# Altium PCB PCB1.PcbDoc
Units mm, origin at the board's own origin, x right, y up, seen from the top; angles counter-clockwise.
Board outline 30.17 x 30.17 mm, 4 copper layers (Top Layer, Layer 1, Layer 2, Bottom Layer), stack 0.603 mm thick; 57 components, 53 nets, 226 pads, 94 vias.
Unrouted connection lines stored in the file: 5.
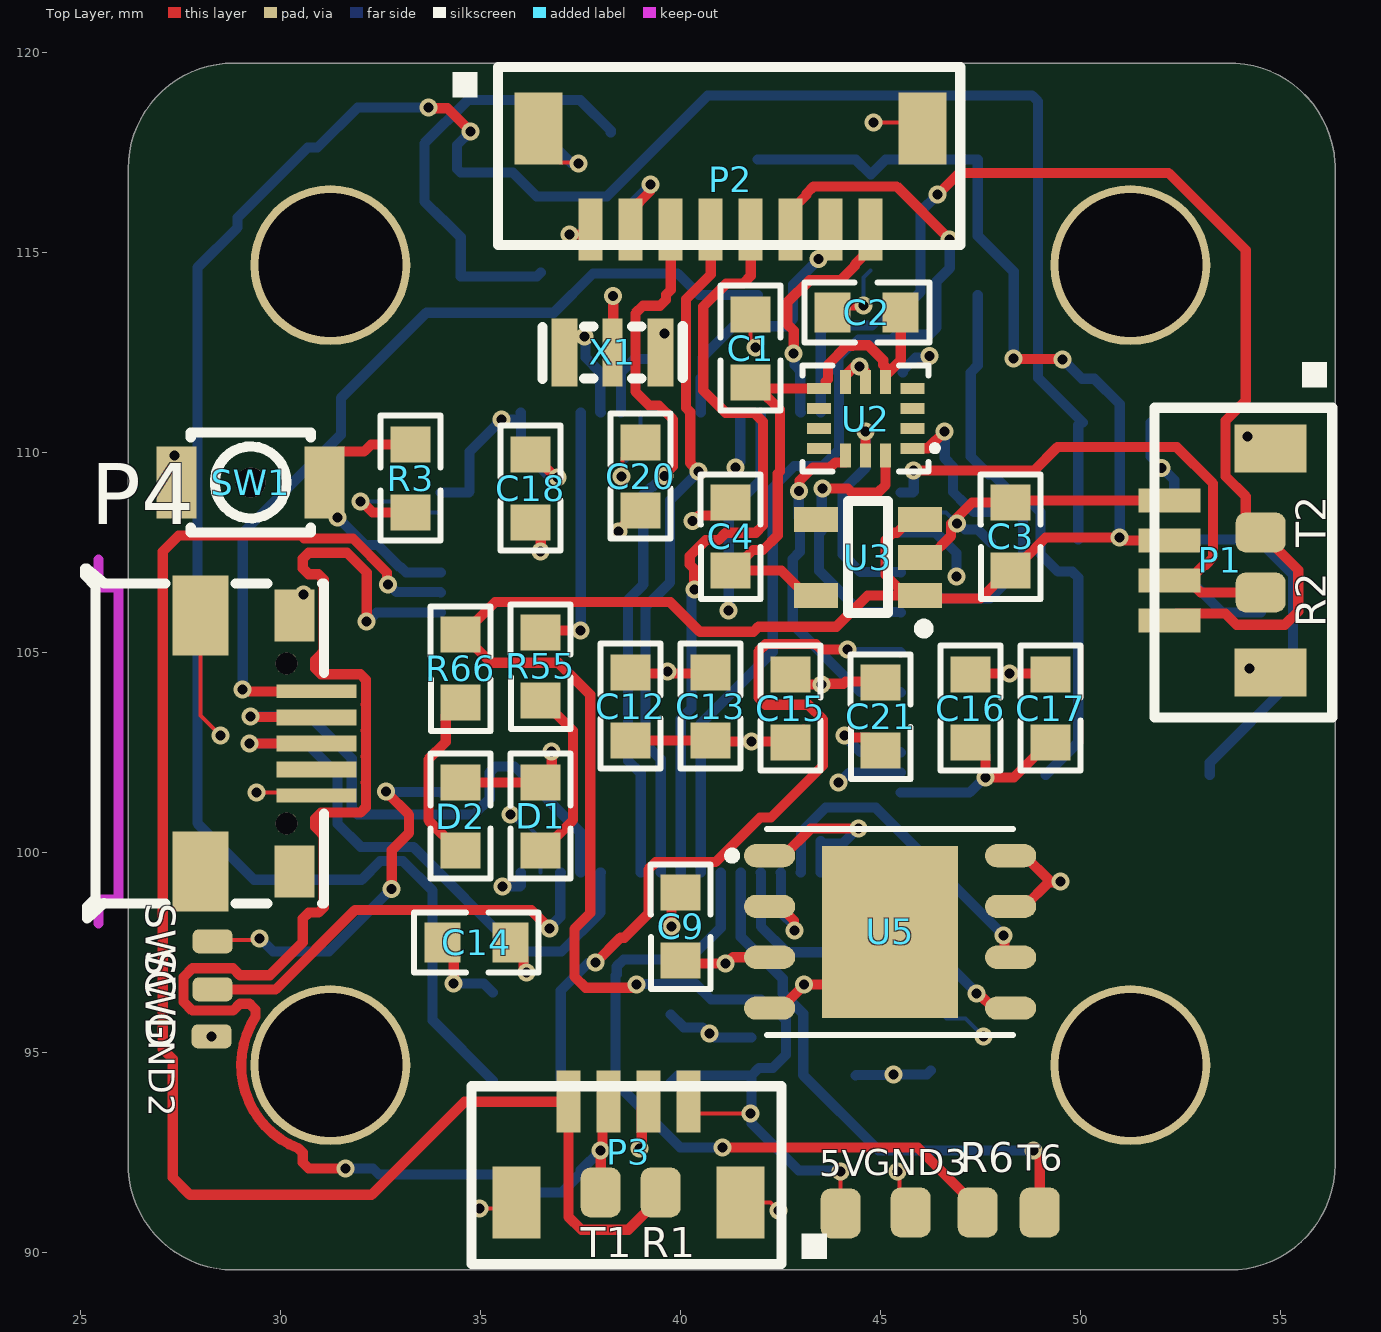
[diagram p0: Top Layer view]
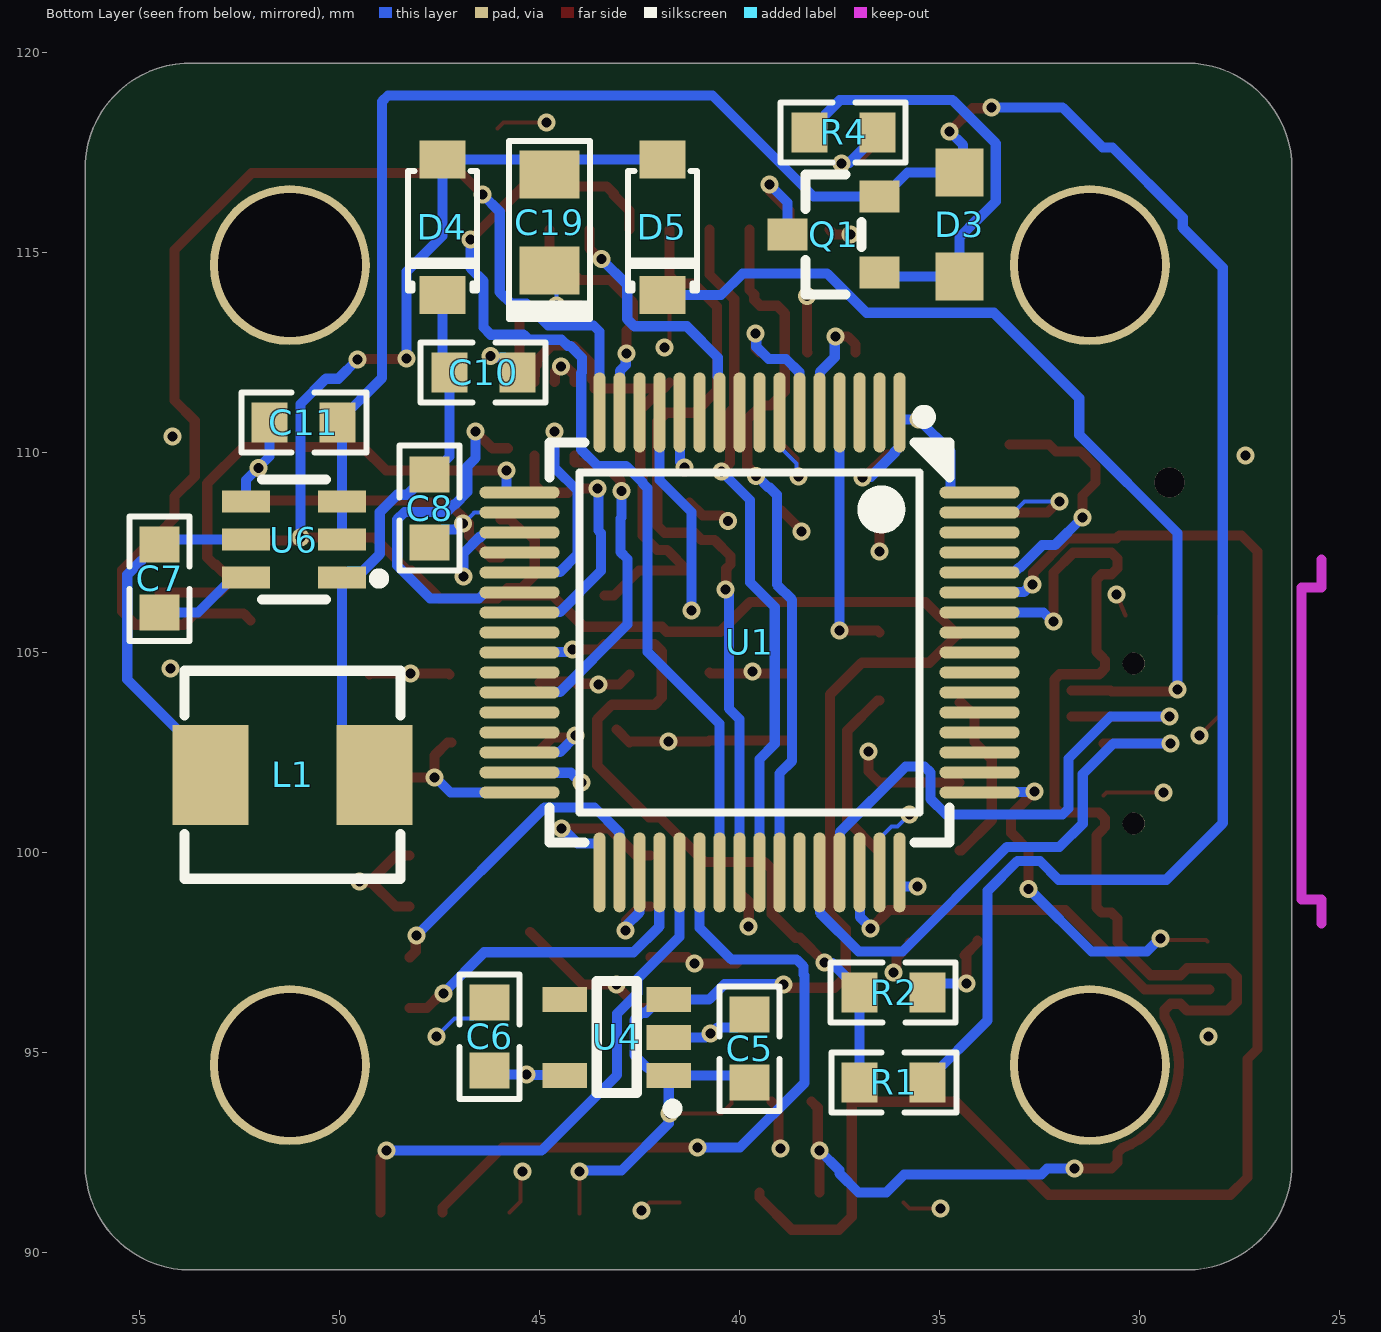
[diagram p1: Bottom Layer view, seen from below]
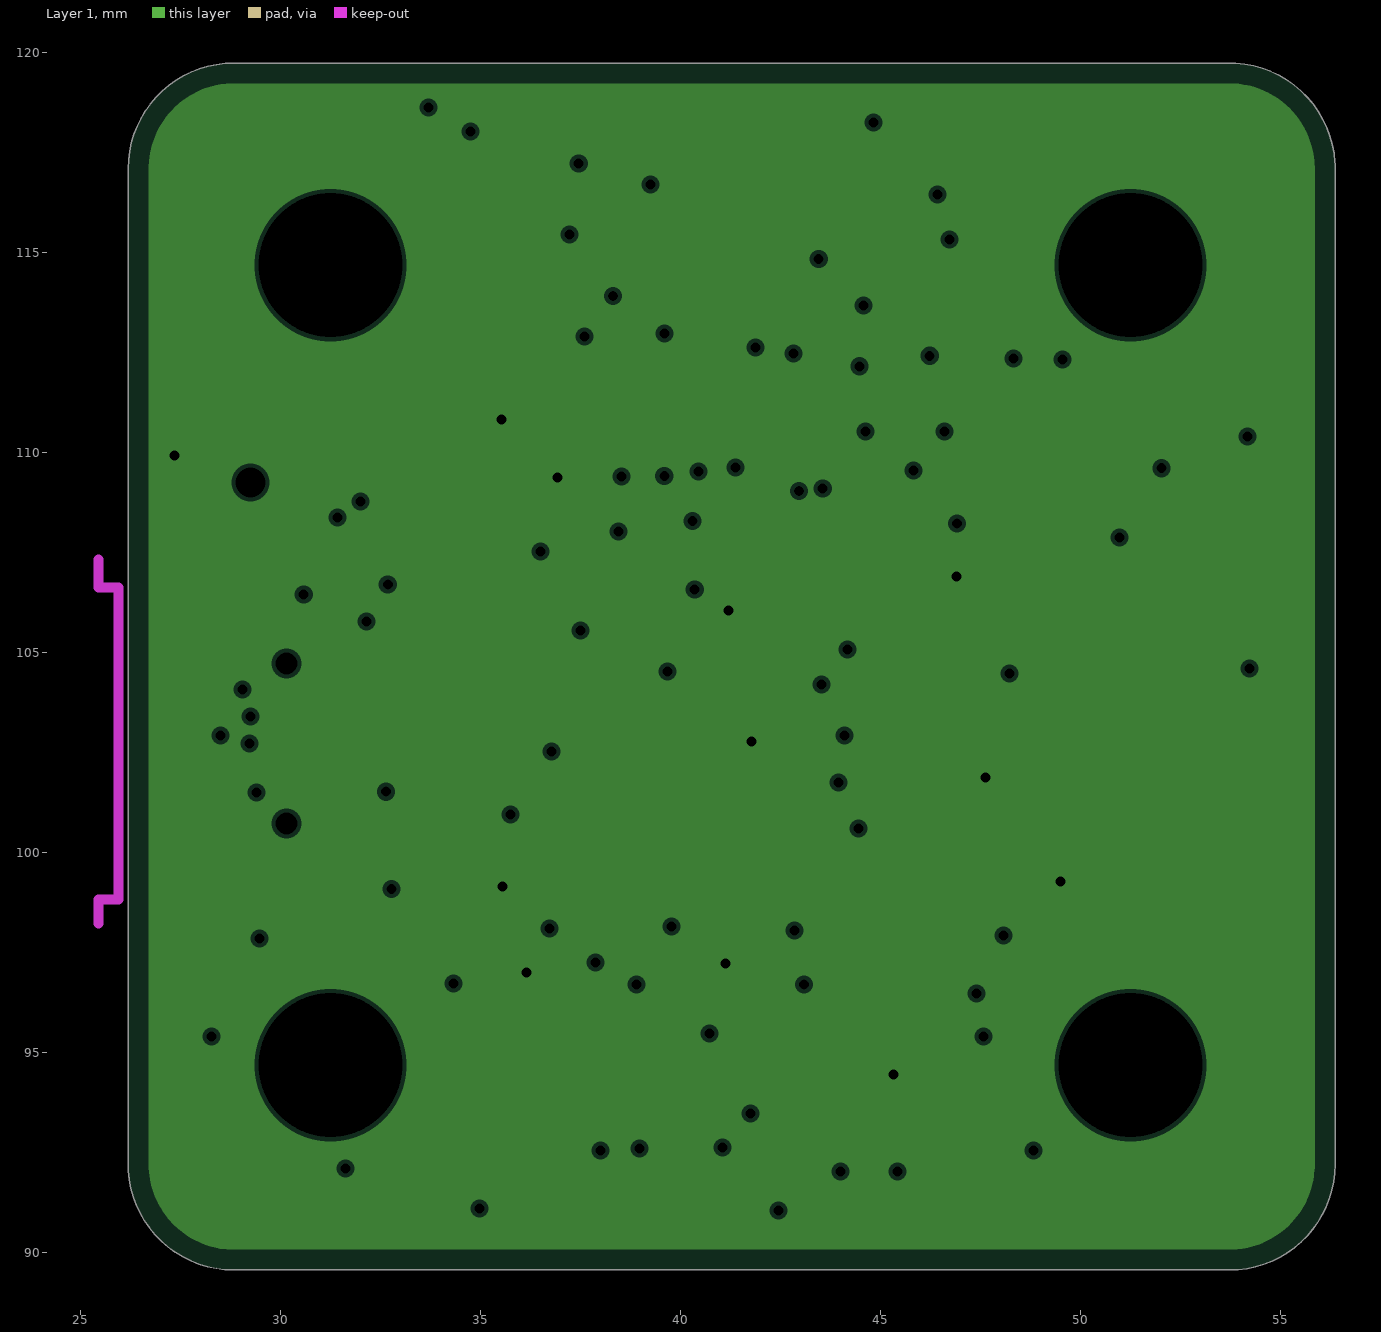
[diagram p2: Layer 1, clearances drawn from the general rule]
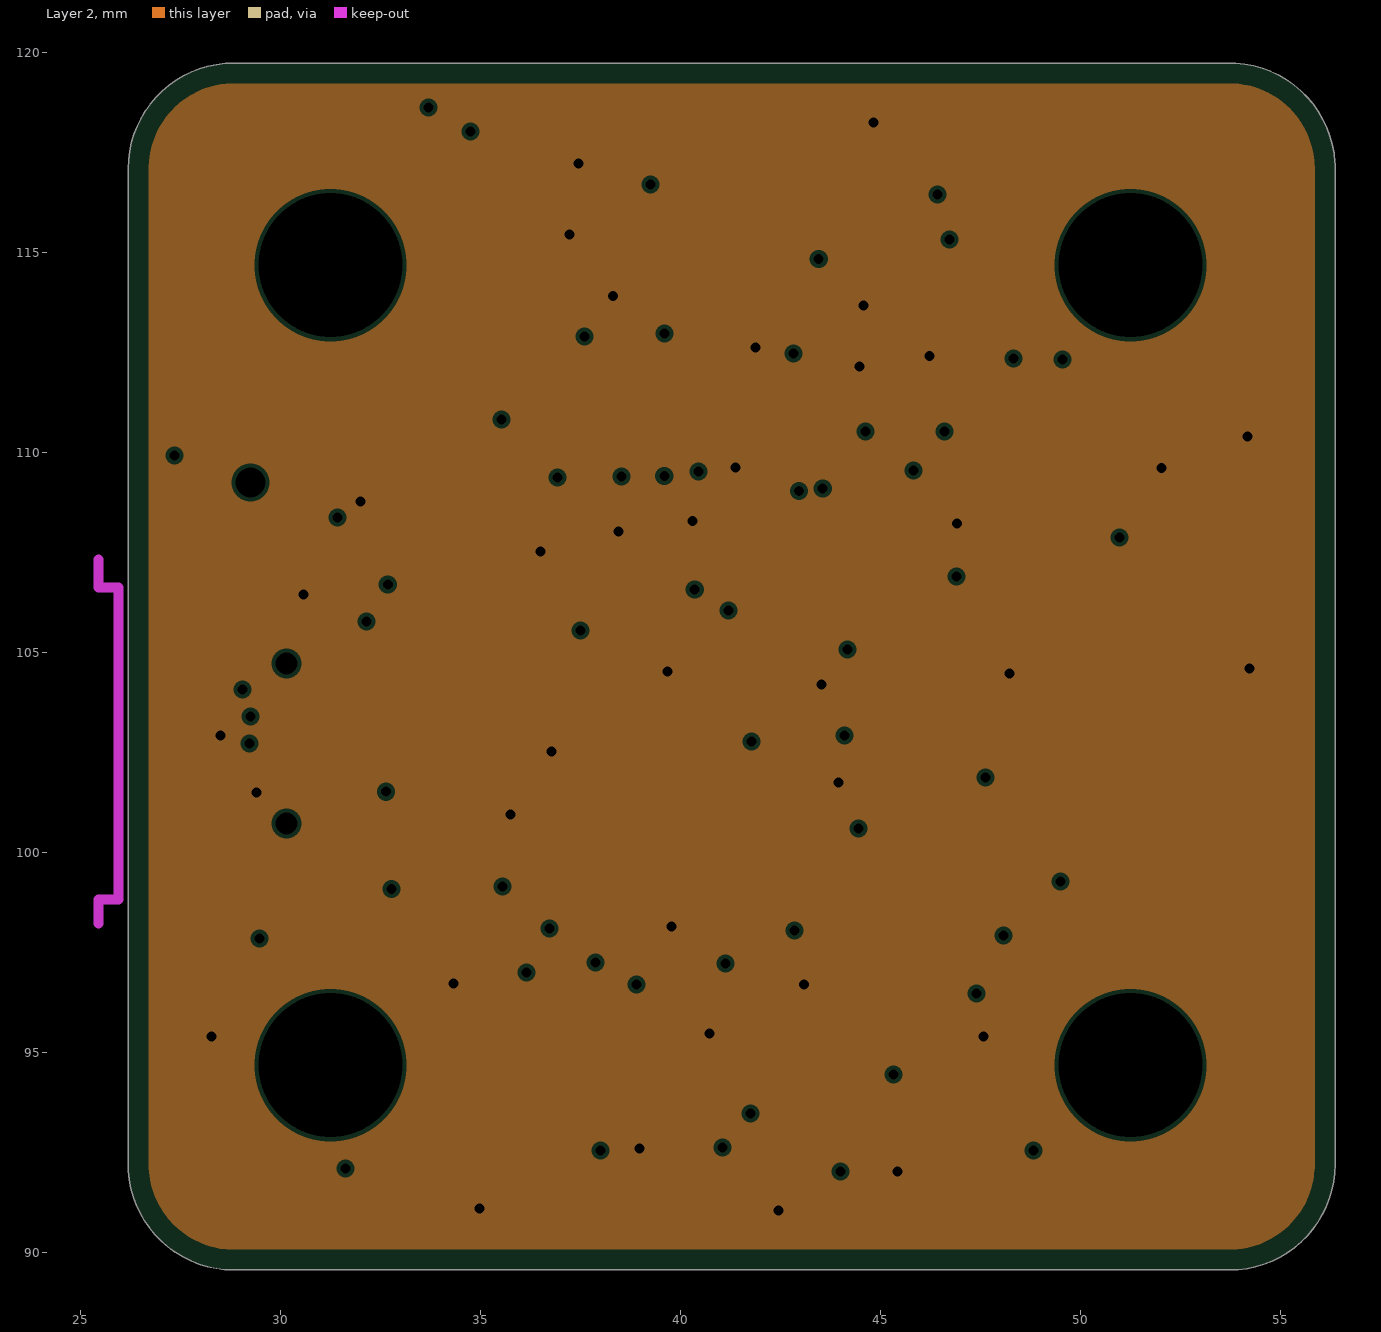
[diagram p3: Layer 2, clearances drawn from the general rule]

## Layer stack, top to bottom
Top Solder: solder mask 0.0102, Solder Resist, Dk 3.5
Top Layer: signal copper 0.0356
Dielectric 2: prepreg 0.0711, PP-006, Dk 4.1
Layer 1: plane copper 0.035, net 3V3
Dielectric 1: dielectric 0.32, FR-4, Dk 4.8
Layer 2: plane copper 0.035, net GND
Dielectric 3: prepreg 0.0711, PP-006, Dk 4.1
Bottom Layer: signal copper 0.0356
Bottom Solder: solder mask 0.0102, Solder Resist, Dk 3.5

## Board outline
28.829,89.562 cw(c28.829,92.202) 26.193,92.045 26.189,92.075 26.189,117.094 cw(c28.829,117.094) 28.829,119.734 28.83,119.734 53.721,119.734 53.848,119.734 53.878,119.73 cw(c53.721,117.094) 56.357,117.251 56.361,117.221 56.361,92.202 cw(c53.721,92.202) 53.721,89.562

## Design rules (kind name [scope] priority, off if disabled: settings)
BoardOutlineClearance [All] p1: gap=0.2 ignorepadtopadclearanceinfootprint=FALSE
Clearance [All] p1: gap=0.102 ignorepadtopadclearanceinfootprint=FALSE except(0.127: Arc-Via Track-Via SMDPad-Via THPad-Via Via-Via Via-Fill Via-Poly Via-Region Via-Text; 0.25: Arc-Hole Track-Hole SMDPad-Hole THPad-Hole Via-Hole Fill-Hole Poly-Hole Region-Hole Text-Hole)
ComponentClearance [All] p1: gap=0.102 collisioncheckmode=3 verticalgap=0.102 showdistances=TRUE
DiffPairsRouting [All] p1: maxlimit=0.102 minlimit=0.102 mostfreqgap=0.102 toplayer_minwidth=0.102 toplayer_maxwidth=1816.048 toplayer_prefwidth=0.102 bottomlayer_minwidth=0.102 bottomlayer_maxwidth=1816.048 bottomlayer_prefwidth=0.102 maxuncoupledlength=12.7
Height [All] p1: minheight=0 maxheight=1816.048 prefheight=12.7
HoleSize [All] p1: absolutevalues=TRUE maxlimit=6.3 minlimit=0.2 maxpercent=80.000 minpercent=20.000
HoleToHoleClearance [All] p1: gap=0.25 allowstackedmicrovias=FALSE
MinimumAnnularRing [All] p1: minimumring=0.076
MinimumSolderMaskSliver [All] p1: minsoldermaskwidth=0
PlaneClearance [All] p1: clearance=0.102
PlaneConnect PlaneConnectPowerPads [InPadClass('PowerPads')] p1: planeconnectstyle=Direct reliefexpansion=0.508 reliefentries=4 reliefconductorwidth=0.254 reliefairgap=0.254
PlaneConnect [All] p2: pad.planeconnectstyle=Relief pad.reliefexpansion=0.3 pad.reliefentries=4 pad.reliefconductorwidth=0.102 pad.reliefairgap=0.102 via.planeconnectstyle=Direct via.reliefexpansion=0.3 via.reliefentries=4 via.reliefconductorwidth=0.127 via.reliefairgap=0.127
PolygonConnect PolygonConnectPowerPads [All vs (InPadClass('PowerPads'))] p1: connectstyle=Direct reliefconductorwidth=0.254 reliefentries=4 polygonreliefangle="90 Angle" airgapwidth=0.254
PolygonConnect [All] p2: thpad.connectstyle=Relief thpad.reliefconductorwidth=0.102 thpad.reliefentries=4 thpad.polygonreliefangle="90 Angle" thpad.airgapwidth=0.102 smdpad.connectstyle=Relief smdpad.reliefconductorwidth=0.102 smdpad.reliefentries=4 smdpad.polygonreliefangle="90 Angle" smdpad.airgapwidth=0.102 via.connectstyle=Direct via.reliefconductorwidth=0.127 via.reliefentries=4 via.polygonreliefangle="90 Angle" via.airgapwidth=0.127
RoutingVias [All] p1: holewidth=0.2 width=0.45 viastyle="Through Hole" minholewidth=0.2 minwidth=0.45 maxholewidth=6.3 maxwidth=6.55
SilkToSilkClearance [All] p1: silktosilkclearance=0
SilkToSolderMaskClearance [IsPad] p1: minsilkscreentomaskgap=0.102 clearancetoexposedcopper=TRUE
SolderMaskExpansion [All] p1: expansion=0.075 istentingtop=FALSE
Width [All] p1: maxlimit=1816.048 minlimit=0.102 preferedwidth=0.102
20 further rules are at their usual default settings.

## Classes and differential pairs
component class betterfc: 5V C1 C2 C3 C4 C5 C6 C7 C8 C9 C10 C11 C12 C13 C14 C15 C16 C17 C18 C19 C20 C21 D1 D2 D3 D4 D5 GND2 GND3 L1 P1 P2 P3 Q1 R1 R2 R3 R4 R6 R55 R66 SW1 SWC SWD T1 T2 T6 U1 U2 U3 U4 U5 U6 X1

## Components (designator, comment, footprint, x,y, rotation, side; value= is the part's Value field where it differs from the comment)
5V "PAD" pad#1 44,90.975 r0 top
C1 "100nF" 0603 48.798,118.595 r90 top
C2 "100nF" 0603 50.645,106.452 r0 top
C3 "1uF (X7R)" 0603 41.202,101.905 r270 top
C4 "1uF (X7R)" 0603 34.202,101.905 r270 top
C5 "1uF (X7R)" 0603 46.798,89.105 r270 bottom
C6 "1uF (X7R)" 0603 53.298,89.405 r270 bottom
C7 "100nF" 0603 61.548,100.855 r270 bottom
C8 "22uF" 0603 40.702,114.595 r90 bottom
C9 "100nF" 0603 32.952,92.155 r270 top
C10 "22uF" 0603 52.395,119.048 r0 bottom
C11 "10uF" 0603 44.905,103.702 r180 bottom
C12 "100nF" 0603 45.798,109.645 r90 top
C13 "100nF" 0603 47.798,109.645 r90 top
C14 "100nF" 0603 28.905,104.798 r180 top
C15 "100nF" 0603 49.798,109.595 r90 top
C16 "100nF" 0603 54.298,109.595 r90 top
C17 "4.7uF" 0603 56.298,109.595 r90 top
C18 "100nF" 0603 43.298,115.095 r90 top
C19 "100uF" "polorizedC - duplicate" 44.75,115.75 r90 bottom
C20 "1uF" 0603 46.048,115.395 r90 top
C21 "2.2uF" 0603 37.952,97.405 r270 top
D1 "LED1 (Blue - Status)" 0603 43.548,106.895 r90 top
D2 "LED2 (Red - PWR)" 0603 41.548,106.895 r90 top
D3 "Zenerdiode" Zenerdiode 34.5,117 r90 bottom
D4 "B5819W_C305445" scottydiode 47.5,116 r90 bottom
D5 "B5819W_C305445" scottydiode 42,116 r90 bottom
GND2 "PAD" pad#2 28.275,95.4 r270 top
GND3 "PAD" pad#1 45.75,91 r180 top
L1 "4.7uH" coil 51,101.5 r180 bottom
P1 "RXplug" RXplug 51.336,94.862 r270 top
P2 "ESCplug" ESCplug 40.767,115.57 r0 top
P3 "VTXplug" VTXplug 33.501,90.346 r180 top
P4 "MicroUSB" microUSB 31.493,106.941 r180 top
Q1 "mosfet" mosfet 37.395,115.474 r180 bottom
R1 "10k" 0603 30.155,87.202 r180 bottom
R1 "PAD" pad#1 39.5,91.5 r180 top
R2 "1k" 0603 42.145,103.548 r0 bottom
R2 "PAD" pad#1 54.5,106.5 r90 top
R3 "10k" 0603 40.298,115.345 r90 top
R4 "100k" 0603 43.395,125.048 r0 bottom
R6 "PAD" pad#1 47.425,91 r180 top
R55 "150" 0603 29.452,98.655 r270 top
R66 "150" 0603 27.452,98.605 r270 top
SW1 "button" button 32.996,109.016 r0 top
SWC "PAD" pad#2 28.3,97.775 r90 top
SWD "PAD" pad#2 28.3,96.575 r90 top
T1 "PAD" pad#1 38,91.5 r0 top
T2 "PAD" pad#1 54.5,108 r90 top
T6 "PAD" pad#1 48.975,91 r180 top
U1 "stm32f722" STM32F722RET6 39.35,105.142 r0 bottom
U2 "BMI270" bmi270 44.25,110.75 r0 top
U3 "AP2112K-3.3TRG1" LDO 44.5,107.25 r0 top
U4 "AP2112K-3.3TRG1" LDO 43.25,95.25 r180 bottom
U5 "blackbox" blackbox 45.25,98 r270 top
U6 "AP63205WU-7" AP63205WU-7 51,107.75 r90 bottom
X1 "8Mhz" crystal 38.325,111.015 r0 top

## Footprints (in the part's own frame and the unit in brackets; to place one, negate y for a bottom-side part, rotate by r counter-clockwise, add the part's x,y. Pads: shape width x height; smd on the part's side, far side on the other; paste and mask are expansions set on the pad)
0603 [mm]
  rect 0.9x1 smd paste+0 mask+0.051: 1(-6.845,7.048) 2(-5.145,7.048)
  silkscreen extent -7.54,6.3 -4.43,7.8
AP63205WU-7 [mm]
  rect 0.55x1.2 smd paste+0 mask+0.051: 1(-0.877,-1.061) 2(0.073,-1.061) 3(1.022,-1.061) 4(1.022,1.339) 5(0.073,1.339) 6(-0.877,1.339)
  silkscreen extent -1.43,-2.11 1.57,0.94
blackbox [mm]
  oval 0.581x1.276 smd paste+0 mask+0.051: 1(-1.92,-3.026) 2(-0.65,-3.026) 3(0.62,-3.026) 4(1.89,-3.026) 5(1.89,2.999) 6(0.62,2.999) 7(-0.65,2.999) 8(-1.92,2.999)
  rect 4.3x3.4 smd paste+0 mask+0.051: 9(-0.015,-0.013)
  silkscreen extent -2.59,-4.06 2.56,3.06
bmi270 [mm]
  rect 0.6x0.27 smd paste+0 mask+0.051: 1(1.543,-0.654) 2(1.543,-0.154) 3(1.543,0.346) 4(1.543,0.846) 8(-0.797,0.846) 9(-0.797,0.346) 10(-0.797,-0.154) 11(-0.797,-0.654)
  rect 0.27x0.6 smd paste+0 mask+0.051: 5(0.873,1.016) 6(0.373,1.016) 7(-0.127,1.016) 12(-0.127,-0.824) 13(0.373,-0.824) 14(0.873,-0.824)
  silkscreen extent -1.2,-1.23 2.18,1.42
button [mm]
  rect 1x1.8 smd paste+0 mask+0.051: 1(-5.596,0.234) 2(-1.896,0.234)
  round 0.75 hole 0.75 unplated paste+0: ""(-3.746,0.234)
  silkscreen extent -5.25,-1.02 -2.25,1.48
coil [mm]
  rect 1.9x2.5 smd paste+0 mask+0.051: 1(-2.225,0.441) 2(1.875,0.441)
  silkscreen extent -2.87,-2.16 2.53,3.04
crystal [mm]
  rect 0.65x1.7 smd paste+0 mask+0.051: 1(-1.225,1.485) 3(1.175,1.485)
  rect 0.5x1.7 smd paste+0 mask+0.051: 2(-0.025,1.485)
  silkscreen extent -1.78,0.82 1.73,2.15
ESCplug [mm]
  rect 0.6x1.55 smd: 1(-3.016,0) 2(-2.016,0) 3(-1.016,0) 4(-0.016,0) 5(0.984,0) 6(1.984,0) 7(2.984,0) 8(3.984,0)
  rect 1.2x1.8 smd: 9(-4.316,2.525) 10(5.284,2.525)
  silkscreen extent -6.48,-0.38 6.22,4.06
LDO [mil]
  rect 43.5x24.5 smd paste+0 mask+2: 1(58.25,-32.48) 2(58.25,4.89) 3(58.25,42.3) 4(-44.11,42.3) 5(-44.11,-32.48)
  silkscreen extent -13,-70 67,60
microUSB [mm]
  rect 2x0.34 smd paste+0 mask+0.051: 1(0.592,2.916) 5(0.592,5.516)
  rect 2x0.4 smd paste+0 mask+0.051: 2(0.592,3.566) 3(0.592,4.216) 4(0.592,4.866)
  rect 1x1.3 smd paste+0 mask+0.051: 6(1.143,1.016) 9(1.143,7.416)
  rect 1.4x2 smd paste+0 mask+0.051: 7(3.497,1.016) 8(3.497,7.416)
  round 0.55 hole 0.55 unplated paste+0: ""(1.347,6.216) ""(1.347,2.216)
  Keep-Out Layer lines w0.254: 6.045,8.716 6.045,8.116 5.545,8.116 5.545,8.016 5.545,0.316 6.045,0.316 6.045,-0.384
  silkscreen extent 0.41,-0.15 6.38,8.59
mosfet [mm]
  rect 1x0.8 smd paste+0 mask+0.051: 1(0.895,-0.974) 2(0.895,0.926) 3(-1.405,-0.024)
  silkscreen extent -0.96,-1.52 0.44,1.48
pad#1 [mm]
  rrect50% 1x1.25 smd: 1(0,0)
pad#2 [mm]
  rrect50% 0.6x1 smd: 1(0,0)
"polorizedC - duplicate" [mm]
  rect 1.2x1.5 smd paste+0 mask+0.051: 1(-1.2,0) 2(1.2,0)
  silkscreen extent -2.41,-1.02 2.03,1.02
RXplug [mm]
  rect 0.6x1.55 smd: 1(-13.938,0.889) 2(-12.938,0.889) 3(-11.938,0.889) 4(-10.938,0.889)
  rect 1.2x1.8 smd: 5(-15.238,3.414) 6(-9.638,3.414)
  silkscreen extent -17.4,0.51 -8.51,4.95
scottydiode [mm]
  rect 0.95x1.15 smd paste+0 mask+0.051: 1(-2.065,-0.074) 2(1.32,-0.074)
  silkscreen extent -1.95,-0.94 1.03,0.79
STM32F722RET6 [mm]
  oval 0.3x2 smd paste+0 mask+0.051: 1(-3.35,-5.858) 2(-2.85,-5.858) 3(-2.35,-5.858) 4(-1.85,-5.858) 5(-1.35,-5.858) 6(-0.85,-5.858) 7(-0.35,-5.858) 8(0.15,-5.858) 9(0.65,-5.858) 10(1.15,-5.858) 11(1.65,-5.858) 12(2.15,-5.858) 13(2.65,-5.858) 14(3.15,-5.858) 15(3.65,-5.858) 16(4.15,-5.858) 33(4.15,5.642) 34(3.65,5.642) 35(3.15,5.642) 36(2.65,5.642) 37(2.15,5.642) 38(1.65,5.642) 39(1.15,5.642) 40(0.65,5.642) 41(0.15,5.642) 42(-0.35,5.642) 43(-0.85,5.642) 44(-1.35,5.642) 45(-1.85,5.642) 46(-2.35,5.642) 47(-2.85,5.642) 48(-3.35,5.642)
  oval 2x0.3 smd paste+0 mask+0.051: 17(6.15,-3.858) 18(6.15,-3.358) 19(6.15,-2.858) 20(6.15,-2.358) 21(6.15,-1.858) 22(6.15,-1.358) 23(6.15,-0.858) 24(6.15,-0.358) 25(6.15,0.142) 26(6.15,0.642) 27(6.15,1.142) 28(6.15,1.642) 29(6.15,2.142) 30(6.15,2.642) 31(6.15,3.142) 32(6.15,3.642) 49(-5.35,3.642) 50(-5.35,3.142) 51(-5.35,2.642) 52(-5.35,2.142) 53(-5.35,1.642) 54(-5.35,1.142) 55(-5.35,0.642) 56(-5.35,0.142) 57(-5.35,-0.358) 58(-5.35,-0.858) 59(-5.35,-1.358) 60(-5.35,-1.858) 61(-5.35,-2.358) 62(-5.35,-2.858) 63(-5.35,-3.358) 64(-5.35,-3.858)
  silkscreen extent -4.6,-5.9 5.4,4.89
VTXplug [mm]
  rect 0.6x1.55 smd: 1(-6.699,-3.429) 2(-5.699,-3.429) 3(-4.699,-3.429) 4(-3.699,-3.429)
  rect 1.2x1.8 smd: 5(-7.999,-0.904) 6(-2.399,-0.904)
  silkscreen extent -10.16,-3.81 -1.27,0.63
Zenerdiode [mm]
  rect 1.2x1.2 smd: 1(-2.6,0) 2(0,0)

## Part data
C1 C2 C3 C4 C5 C6 C7 C8 C9 C10 C11 C12 C13 C14 C15 C16 C17 C18 C20 C21: library part C
C19: library part "polorized C"
D1 D2: library part LED
D4 D5: library part ScottyDiode
L1: library part coil
R1 R2 R3 R4 R55 R66: library part R
U3 U4: library part LDO
X1: library part Crystal

## Free pads (board coordinates)
  round 4 hole 3.6: ""(31.242,94.681) ""(31.242,114.681) ""(51.242,94.681) ""(51.242,114.681)

## Via types
v1: diameter 0.45, hole 0.25, Top Layer to Bottom Layer, 94 vias

## Nets (pads, with @x,y where several pads share a name; then routed paths per layer and width w, separated by ;. In a path a pad name is that pad's centre, name@x,y a point inside that pad or via, vN(x,y) a via of type N, cw(c..) or ccw(c..) an arc to the next point about the centre after c; other vN are vias at no path point)
3V3: C6.2 C9.2 C12.1 C13.1 C14.1 C15.1 C16.1 C17.1 C18.2 SW1.1 U1.1 U1.13 U1.19 U1.32 U1.48 U1.64 U4.5 U5.3 U5.7 U5.8 | length 32.4
  Top Layer w0.254: C14.1 35.75,97.7 36.073,97.377 36.073,97.101 36.15,97.024 v1(36.15,96.998) ; C18.2 36.3,109.95 36.857,109.393 36.907,109.393 v1(36.925,109.375) ; C12.1 C13.1 40.775,102.775 v1(41.775,102.775) 42.725,102.775 C15.1 C15.1@43.073,103.073 ; C9.2 40.075,97.225 v1(41.125,97.225) 41.151,97.225 41.306,97.38 U5.3 ; C16.1@47.2,102.75 C16.1 47.3,102.75 47.623,102.427 47.623,101.877 v1(47.625,101.875) 48.325,101.875 49.2,102.75 C17.1 ; U5.7 48.597,98.65 49.204,99.257 49.482,99.257 v1(49.5,99.275) ; U5.8 48.597,99.92 49.223,99.293
  Bottom Layer w0.254: U1.64 34.702,109 34.723,109.021 34.723,110.023 v1(35.525,110.825) 35.979,110.825 U1.1@36,110.846 ; v1(35.55,99.15) 35.979,99.15 36,99.171 U1.48 ; U1.1 36.009,110.991 36.009,110.129 36.121,110.016 36.121,109.993 36.721,109.393 36.907,109.393 v1(36.925,109.375) ; v1(41.2,106.045) 41.2,108.51 42,109.31 U1.13 ; U4.5 44.383,94.438 45.313,94.438 v1(45.325,94.45) 46.15,94.45 C6.2 ; U1.32 47.224,101.5 47.599,101.875 v1(47.625,101.875) ; U1.19 46.362,108 46.484,107.878 46.507,107.878 46.897,107.488 v1(46.897,106.9)
  other v1: 27.35,109.925
3V3_IMU: C1.1 C2.2 C4.2 U2.5 U2.8 U3.5 | length 14.4
  Top Layer w0.254: C4.2 C4.2@41.3,107.05 ; C1.1 41.904,111.596 42.52,111.596 43.618,111.596 43.626,111.604 43.626,111.769 43.681,111.824 43.681,112.193 44.152,112.664 44.298,112.664 44.316,112.682 44.69,112.682 45.065,112.307 45.065,112.193 45.115,112.143 U2.5@45.115,111.931 ; C1.1@41.954,111.596 42.482,111.068 42.482,109.526 42.427,109.47 42.427,107.929 42.057,107.559 41.809,107.559 C4.2@41.3,107.05 ; U3.5 43.138,106.425 42.513,107.05 C4.2@41.3,107.05 ; U2.5 45.123,111.931 45.5,112.308 C2.2
4V5: D5.1 P4.1 | length 22.9
  Top Layer w0.254: v1(29.05,104.075) 29.076,104.075 29.126,104.025 P4.1@30.7,104.025 ; P4.1@30.7,104.025 30.725,104.05 P4.1@31.7,104.05
  Bottom Layer w0.254: v1(29.05,104.075) 29.05,107.987 31.506,110.442 31.506,111.356 33.643,113.493 36.827,113.493 37.809,114.475 39.923,114.475 40.463,113.935 D5.1
5V: 5V.1 C3.2 C5.2 C19.2 D4.2 D5.2 P1.2 P3.1 R66.1 U3.1 U3.3 U4.1 U4.3 | length 67.6
  Top Layer w0.102: P3.1 40.2,93.724 40.449,93.475 v1(41.75,93.475) ; 5V.1 v1(44,92.025)
  Top Layer w0.254: R66.1 R66.1@34.55,105.45 ; v1(38.9,96.7) 38.874,96.7 38.792,96.618 37.625,96.618 37.343,96.9 37.343,98.086 37.741,98.484 37.741,103.943 36.941,104.743 35.257,104.743 R66.1@34.55,105.45 ; U3.3 45.738,108.324 45.406,107.992 45.3,107.992 45.12,107.812 45.12,106.936 45.447,106.609 45.795,106.609 U3.1 ; v1(48.325,112.35) 48.338,112.337 49.538,112.337 v1(49.55,112.325) ; P1.2 51.076,107.8 51.001,107.875 49.125,107.875 48.3,107.05 48.2,107.05 47.498,106.348 46.057,106.348 U3.1 ; R66.1@34.55,105.45 35.357,106.257 39.741,106.257 40.48,105.518 41.82,105.518 41.943,105.641 43.893,105.641 44.677,106.425 U3.1
  Bottom Layer w0.254: v1(38.9,96.7) 38.907,96.707 40.377,96.707 40.76,96.324 U4.3 42.012,96.324 42.344,95.992 42.45,95.992 42.63,95.812 42.63,94.936 42.303,94.609 41.955,94.609 U4.1 ; C5.2 39.925,94.425 U4.1 ; D5.2 44.38,117.32 C19.2 45.12,117.32 D4.2 47.426,115.419 48.325,114.521 v1(48.325,112.35) ; v1@44,92.05 42.95,92.05 41.77,93.23 U4.1 ; v1(49.55,112.325) 50.033,111.842 50.342,111.842 50.975,111.209 v1(50.975,107.875)
5V_REG: C8.2 C10.2 D4.1 L1.2 U6.1 | length 13.9
  Bottom Layer w0.254: D4.1 47.426,112.176 C10.2 47.25,109.9 47.7,109.45 C8.2 47.8,109.45 48.309,108.941 48.557,108.941 48.994,108.504 48.994,107.458 49.432,107.021 49.791,107.021 U6.1 49.939,102.755 L1.2
GND: C1.2 C2.1 C3.1 C4.1 C5.1 C6.1 C8.1 C9.1 C10.1 C11.1 C12.2 C13.2 C14.2 C15.2 C16.2 C17.2 C18.1 C19.1 C20.1 C21.1 D1.2 D2.2 GND2.1 GND3.1 P1.1 P1.5 P1.6 P2.1 P2.9 P2.10 P3.2 P3.5 P3.6 P4.5 P4.6 P4.7 R2.1@35.3,96.5 R3.1 R4.1 U1.12 U1.18 U1.31 U1.47 U1.63 U2.6 U2.7 U3.2 U4.2 U5.4 U5.9 U6.4 X1.2 | length 64.1
  Top Layer w0.102: P4.7 27.996,103.429 v1(28.5,102.925) ; v1(29.4,101.5) 30.825,101.5 P4.5 ; P4.6 v1(30.577,106.452) ; v1(34.975,91.1) 35.75,91.1 P3.6 ; P2.9 36.451,117.795 37,117.246 37.43,117.246 v1(37.451,117.225) ; P3.5 42.25,91.25 v1(42.45,91.05) ; C1.2 41.75,112.817 41.875,112.692 v1(41.875,112.625) ; v1(44.825,118.25) 45.896,118.25 P2.10 ; v1(45.425,92.023) 45.473,91.975 45.473,91.277 GND3.1
  Top Layer w0.254: v1(32,108.775) 32.026,108.775 32.301,108.5 R3.1 ; C14.2@34.05,97.8 C14.2 34.373,97.427 34.325,97.379 v1(34.325,96.725) ; D2.2 D1.2 36.775,102.025 v1(36.775,102.525) ; C18.1 36.5,108 v1(36.5,107.525) ; v1(37.225,115.45) 37.631,115.45 P2.1 ; X1.2 38.313,112.513 v1(38.313,113.913) ; v1(38.45,108.025) 38.45,108.05 38.95,108.55 C20.1 ; C12.2 38.775,104.475 39.599,104.475 39.649,104.525 39.701,104.525 39.751,104.475 40.725,104.475 C13.2 ; v1(38.975,92.6) 38.975,92.626 39.027,92.678 39.027,93.602 P3.2 ; v1(39.771,98.15) 39.771,98.771 C9.1 ; v1(40.293,108.289) 40.319,108.289 40.457,108.427 40.927,108.427 C4.1 ; U5.4 42.514,96.11 43.079,96.674 v1(43.079,96.7) ; C15.2 43,104.2 v1(43.525,104.2) 43.543,104.218 44.062,104.218 44.119,104.275 44.975,104.275 C21.1 ; v1@43.034,96.7 43.922,96.7 U5.9 ; C2.1 43.975,113.675 v1(44.575,113.675) ; U2.7 44.123,111.931 44.328,112.136 44.45,112.136 v1(44.468,112.155) ; v1@44.423,112.22 44.615,112.028 44.615,111.774 U2.6 ; U3.2 46.221,107.374 46.761,107.914 v1@46.761,108.224 ; v1(46.907,108.224) v1@46.761,108.224 ; C16.2 47.275,104.475 v1(48.225,104.475) 49.225,104.475 C17.2 ; P1.1 48.3,108.8 C3.1 47.286,108.75 v1@46.761,108.224
  Bottom Layer w0.102: v1(32,108.775) 32.875,108.775 33.15,108.5 U1.63 ; v1(35.75,100.95) 36.048,100.652 36.198,100.652 36.5,100.35 U1.47 ; v1(44.575,113.675) 44.575,114.375 C19.1 ; U1.18 46.632,108.5 v1(46.907,108.224) ; C6.1 46.649,95.851 47.124,95.851 v1(47.575,95.4)
  Bottom Layer w0.254: v1(34.325,96.725) 35.075,96.725 R2.1@35.3,96.5 ; R4.1 36.55,117.95 37.257,117.243 37.433,117.243 v1(37.451,117.225) ; C5.1 40.073,95.627 40.547,95.627 40.699,95.475 v1(40.725,95.475) 40.751,95.475 40.852,95.374 U4.2 ; v1(41.375,109.625) 41.375,109.651 41.491,109.767 41.491,110.991 U1.12 ; v1(43.95,101.75) 43.976,101.75 44.217,101.991 45.491,101.991 U1.31 ; C10.1 45.55,112.05 45.873,112.373 46.156,112.373 46.2,112.416 v1(46.225,112.416) ; v1(46.907,108.224) 46.96,108.224 47.111,108.073 47.427,108.073 C8.1 ; C11.1 51.75,109.9 v1@52.025,109.625 ; v1(52.025,109.605) v1@52.025,109.625 ; U6.4 52.339,109.311 v1@52.025,109.625
  other v1: 28.275,95.4 39.675,104.525 54.225,104.6 54.175,110.4
NetC7_1: C7.1 L1.1 U6.5 | length 9.2
  Bottom Layer w0.254: U6.5 54.377,107.823 C7.1 54.55,107.7 55.307,106.943 55.307,104.323 53.225,102.241 L1.1
NetC7_2: C7.2 U6.6 | length 2.5
  Bottom Layer w0.254: U6.6 52.664,106.873 53.536,106 C7.2
NetC20_2: C20.2 U1.7 | length 2.9
  Top Layer w0.102: v1(38.525,109.4) 38.551,109.426 38.551,109.851 38.95,110.25 C20.2
  Bottom Layer w0.102: v1(38.525,109.4) 38.573,109.448 38.573,109.723 39,110.15 U1.7
NetC21_2: C21.2 U1.30 | length 2.6
  Top Layer w0.254: v1(44.1,102.925) 44.126,102.925 44.178,102.873 44.677,102.873 C21.2
  Bottom Layer w0.254: v1(44.1,102.925) 44.1,102.904 44.495,102.509 45.491,102.509 U1.30
NetD1_1: D1.1 R55.2 | length 4.5
  Top Layer w0.254: D1.1 36.55,100.05 37.307,100.807 37.307,103.043 36.55,103.8 R55.2
NetD2_1: D2.1 R66.2 | length 4.4
  Top Layer w0.254: D2.1 34.45,100.05 33.693,100.807 33.693,102.327 34.127,102.761 34.127,103.427 34.45,103.75 R66.2
NetD3_1: D3.1 Q1.1 R4.2 | length 11.2
  Bottom Layer w0.254: Q1.1 36.4,114.4 D3.1 34.5,115.381 34.054,115.827 34.039,115.827 33.593,116.273 33.593,117.727 34.673,118.807 37.493,118.807 38.25,118.05 R4.2
NetP1_3: P1.3 R2.1@54.5,106.5 U1.17 | length 14.1
  Top Layer w0.254: v1(45.825,109.55) 48.836,109.55 49.418,110.132 52.402,110.132 53.307,109.227 53.307,107.373 53.127,107.193 53.093,107.193 P1.3@52.7,106.8 ; P1.3 P1.3@52.7,106.8 ; R2.1@54.5,106.5 53,106.5 P1.3@52.7,106.8
  Bottom Layer w0.254: U1.17 45.804,109 45.825,109.021 v1(45.825,109.55)
NetP1_4: P1.4 T2.1 U1.16 | length 29.8
  Top Layer w0.254: v1(46.425,116.45) 46.963,116.988 52.198,116.988 54.125,115.061 54.125,111.298 53.621,110.795 53.621,109.405 54.125,108.902 54.125,108.364 54.489,108 T2.1 55.438,107.062 55.438,106.026 55.106,105.693 53.894,105.693 53.614,105.973 52.398,105.973 P1.4
  Bottom Layer w0.254: U1.16 43.5,113.024 43.649,113.173 44.783,113.173 45.328,113.718 45.702,113.718 45.993,114.009 45.993,116.018 v1(46.425,116.45)
NetP2_3: P2.3 U1.42 | length 17.8
  Top Layer w0.254: v1(39.59,109.41) 39.59,109.436 39.807,109.653 39.807,110.827 39.459,111.175 39.216,111.175 38.868,111.523 38.868,113.477 39.058,113.668 39.483,113.668 39.632,113.816 39.632,113.944 39.751,114.063 P2.3
  Bottom Layer w0.254: U1.42 39,101.977 38.684,102.293 38.684,106.314 39.066,106.696 39.066,108.941 39.246,109.121 39.274,109.121 39.564,109.41 v1(39.59,109.41)
NetP2_4: P2.4 U1.41 | length 17.2
  Top Layer w0.254: v1(40.45,109.525) 40.241,109.734 40.241,111.007 40.132,111.116 40.132,113.83 40.751,114.449 P2.4
  Bottom Layer w0.254: U1.41 39.5,102.332 39.118,102.714 39.118,106.135 39.737,106.754 39.737,108.812 v1(40.45,109.525)
NetP2_5: P2.5 U1.40 | length 19.4
  Top Layer w0.254: v1(40.351,106.571) 40.333,106.59 40.333,107.091 40.225,107.199 40.225,107.409 40.623,107.807 40.944,107.807 41.13,107.993 41.877,107.993 42.057,108.173 42.057,110.768 41.832,110.993 41.123,110.993 40.566,111.55 40.566,113.65 41.136,114.221 41.558,114.221 41.751,114.414 P2.5
  Bottom Layer w0.254: U1.40 40,103.331 40.267,103.598 40.267,106.442 40.333,106.508 40.333,106.553 v1(40.351,106.571)
NetP2_6: P2.6 U1.39 | length 25.1
  Top Layer w0.254: P2.6 42.751,116.045 43.144,116.438 43.144,116.472 43.324,116.652 45.398,116.652 v1(46.725,115.325)
  Bottom Layer w0.254: U1.39 40.5,103.217 42.3,105.017 42.3,109.107 42.427,109.234 42.427,109.254 42.835,109.663 43.548,109.663 43.957,110.071 43.957,111.98 43.941,111.996 43.941,112.373 44.232,112.664 44.298,112.664 44.451,112.817 45.272,112.817 45.398,112.943 46.218,112.943 46.398,113.123 46.398,114.28 46.725,114.607 v1(46.725,115.325)
NetP2_7: P2.7 U1.10 | length 6.7
  Top Layer w0.254: v1(43.451,114.834) 43.469,114.852 43.508,114.852 43.751,115.095 P2.7
  Bottom Layer w0.254: U1.10 40.5,111.862 40.543,111.905 40.543,112.374 41.321,113.153 42.629,113.153 42.808,113.333 42.808,114.191 v1(43.451,114.834)
NetP2_8: P2.8 U1.15 | length 6
  Top Layer w0.254: v1(42.825,112.475) 42.825,113.048 42.668,113.205 42.668,113.752 43.223,114.307 43.997,114.307 44.358,114.668 44.358,114.702 44.751,115.095 P2.8
  Bottom Layer w0.254: v1(42.825,112.475) 42.843,112.457 42.843,112.185 42.991,112.037 42.991,111.009 U1.15
NetP3_3: P3.3 T1.1 U1.58 | length 39
  Top Layer w0.254: v1(31.625,92.1) 30.699,92.1 30.624,92.174 30.55,92.249 30.55,92.491 30.476,92.565 ccw(c30.296,92.386) 30.475,92.566 30.439,92.602 cw(c31.242,94.681) 29.371,95.893 29.371,95.965 29.371,96.071 29.297,96.145 29.223,96.219 28.98,96.219 28.807,96.046 27.793,96.046 27.571,96.268 27.571,96.882 27.793,97.104 28.807,97.104 28.98,96.931 29.726,96.931 30.55,97.754 30.55,98.348 30.699,98.496 30.945,98.496 31.079,98.63 31.079,100.42 30.945,100.554 30.936,100.562 30.861,100.637 30.861,100.742 30.861,100.847 30.936,100.922 31.01,100.996 31.995,100.996 32.129,101.13 32.129,101.719 cw(c32.382,101.75) 32.129,101.78 32.129,102.369 cw(c32.382,102.4) 32.129,102.43 32.129,103.02 cw(c32.382,103.05) 32.129,103.081 32.129,103.67 cw(c32.382,103.7) 32.129,103.731 32.129,104.32 31.995,104.454 31.01,104.454 30.936,104.528 30.861,104.603 30.861,104.708 30.861,104.813 30.935,104.888 30.944,104.896 31.079,105.03 31.079,106.82 30.945,106.954 30.699,106.954 30.55,107.102 30.55,107.342 30.624,107.417 30.699,107.491 31.659,107.491 32.15,107 v1(32.15,105.775) ; T1.1 38,92.576 38.043,92.619 38.043,93.618 P3.3
  Bottom Layer w0.254: v1(31.625,92.1) 32.308,92.1 32.458,91.95 35.882,91.95 36.332,91.5 37.025,91.5 37.503,91.978 37.503,92.053 v1(38,92.55) ; v1(32.15,105.775) 32.176,105.775 32.401,106 U1.58
NetP3_4: P3.4 R1.1@39.5,91.5 U1.59 | length 40.4
  Top Layer w0.254: v1(32.677,106.7) 32.659,106.718 32.659,106.994 31.806,107.847 30.581,107.847 30.503,107.925 27.451,107.925 27.05,107.524 27.05,95.087 27.302,94.835 27.302,91.872 27.731,91.443 32.273,91.443 34.598,93.768 37.193,93.768 37.193,90.894 37.519,90.568 38.693,90.568 39.5,91.375 R1.1@39.5,91.5
  Bottom Layer w0.254: v1(32.677,106.7) 32.703,106.7 32.894,106.509 33.991,106.509 U1.59
NetP4_2: P4.2 U1.45 | length 15
  Top Layer w0.254: v1(29.25,103.4) 29.262,103.388 30.713,103.388 30.725,103.4 P4.2@31.7,103.4
  Bottom Layer w0.254: v1(29.25,103.4) 30.725,103.4 31.775,102.35 31.775,101.097 31.924,100.948 34.834,100.948 35.229,101.343 35.229,102.001 35.377,102.15 35.846,102.15 37.491,100.505 37.491,99.509 U1.45
NetP4_3: P4.3 U1.44 | length 14.7
  Top Layer w0.254: v1(29.225,102.725) P4.3
  Bottom Layer w0.254: v1(29.225,102.725) 30.655,102.725 31.419,101.96 31.419,100.719 31.999,100.14 33.313,100.14 35.928,97.525 37.021,97.525 37.991,98.495 37.991,99.491 U1.44
NetR1_1: R1.1@37,94.25 R2.2 U1.25 | length 19.7
  Top Layer w0.254: v1(37.875,97.25) 38.493,97.868 38.593,97.868 39.193,98.468 39.193,99.577 39.373,99.757 40.869,99.757 41.987,100.875 42.259,100.875 43.557,102.173 43.557,103.327 43.191,103.693 42.123,103.693 41.943,103.873 41.943,105.027 42.123,105.207 43.377,105.207 43.509,105.075 v1(44.175,105.075)
  Bottom Layer w0.254: R1.1@37,94.25 37,96.55 37.682,97.232 37.857,97.232 v1(37.875,97.25) ; v1(44.175,105.075) 44.201,105.075 44.267,105.009 45.491,105.009 U1.25
NetR3_2: R3.2 SW1.2 U1.60 | length 6.9
  Top Layer w0.254: v1(31.425,108.374) 31.425,108.925 SW1.2 31.1,109.65 31.473,110.023 32.087,110.023 32.264,110.2 R3.2
  Bottom Layer w0.254: v1(31.425,108.374) 32.117,107.682 32.432,107.682 32.993,107.121 33.016,107.121 33.138,107 U1.60
NetR6_1: R6.1 U1.38 | length 17.8
  Top Layer w0.254: v1(41.05,92.625) 45.925,92.625 47.425,91.125 R6.1
  Bottom Layer w0.254: U1.38 41,98.119 40.204,97.323 38.573,97.323 38.402,97.152 38.402,96.947 38.373,96.918 38.373,94.243 39.991,92.625 v1(41.05,92.625)
NetR55_1: R55.1 U1.4 | length 6.5
  Top Layer w0.254: R55.1 36.55,105.55 v1(37.5,105.55)
  Bottom Layer w0.254: v1(37.5,105.55) U1.4
NetSWC_1: SWC.1 U1.49 | length 9.5
  Top Layer w0.102: SWC.1 28.337,97.812 29.438,97.812 v1(29.475,97.85)
  Top Layer w0.254: v1(32.631,101.519) 33.211,100.939 33.211,100.493 32.775,100.057 v1(32.775,99.084)
  Bottom Layer w0.254: v1(29.475,97.85) 29.491,97.85 29.816,97.525 31.2,97.525 32.759,99.084 v1(32.775,99.084) ; v1(32.631,101.519) 32.641,101.509 33.991,101.509 U1.49
NetSWD_1: SWD.1 U1.46 | length 11
  Top Layer w0.254: SWD.1@28.25,96.575 29.873,96.575 31.855,98.557 36.268,98.557 v1(36.725,98.1)
  Bottom Layer w0.254: v1(36.725,98.1) 36.725,98.126 36.991,98.392 36.991,99.491 U1.46
NetT6_1: T6.1 U1.37 | length 13.9
  Top Layer w0.254: v1(48.825,92.55) 48.825,92.524 48.975,92.374 T6.1
  Bottom Layer w0.254: U1.37 41.5,97.893 42.552,96.841 42.552,96.482 43.064,95.969 43.064,94.434 44.948,92.55 v1(48.825,92.55)
NetU1_5: U1.5 X1.1 | length 2.8
  Top Layer w0.254: X1.1 37.1,112.702 37.298,112.9 v1(37.6,112.9)
  Bottom Layer w0.254: v1(37.6,112.9) 37.618,112.882 37.618,112.378 37.991,112.005 37.991,111.009 U1.5
NetU1_6: U1.6 X1.3 | length 3.2
  Top Layer w0.254: X1.3 39.6,112.6 v1(39.6,112.975)
  Bottom Layer w0.254: U1.6 38.509,111.009 38.509,112.005 38.839,112.336 39.273,112.336 39.582,112.644 39.582,112.957 v1(39.6,112.975)
NetU1_8: U1.8
NetU1_14: U1.14
NetU1_20: U1.20
NetU1_21: U1.21 U2.13 | length 5.5
  Top Layer w0.254: U2.13@44.624,109.927 v1(44.625,110.52)
  Bottom Layer w0.254: v1(44.625,110.52) 44.625,109.621 44.052,109.048 44.052,107.451 44.495,107.009 45.491,107.009 U1.21
NetU1_22: U1.22 U2.1 | length 9.2
  Top Layer w0.254: U2.1 45.801,110.104 46.179,110.104 v1(46.6,110.525)
  Bottom Layer w0.254: U1.22 46.362,106.5 46.514,106.348 47.732,106.348 48.557,107.173 48.557,108.327 48.377,108.507 47.334,108.507 47.148,108.693 47.123,108.693 46.807,109.009 46.807,109.651 46.6,109.857 v1(46.6,110.525)
NetU1_23: U1.23 U2.14 | length 7
  Top Layer w0.254: v1(43.55,109.1) 44.184,109.1 44.293,108.991 44.926,108.991 45.123,109.187 U2.14
  Bottom Layer w0.254: v1(43.55,109.1) 43.525,109.075 43.525,108.045 43.461,107.981 43.461,107.042 44.495,106.009 45.491,106.009 U1.23
NetU1_24: U1.24
NetU1_27: U1.27 U2.12 | length 8.6
  Top Layer w0.254: v1(42.954,109.036) 42.972,109.054 42.972,109.292 43.307,109.627 43.743,109.627 43.869,109.753 44.115,109.753 44.123,109.761 U2.12
  Bottom Layer w0.254: v1(42.954,109.036) 42.954,108.378 42.979,108.353 42.979,107.513 42.8,107.334 42.8,105.703 44.495,104.009 45.491,104.009 U1.27
NetU1_28: U1.28
NetU1_29: U1.29
NetU1_33: U1.33 U5.1 | length 4.4
  Top Layer w0.254: U5.1 42.571,99.92 43.248,100.596 v1(44.448,100.596)
  Bottom Layer w0.254: U1.33 43.5,100.28 43.5,100.244 43.521,100.223 44.048,100.223 44.422,100.596 v1(44.448,100.596)
NetU1_34: U1.34 U5.6 | length 8.3
  Top Layer w0.254: v1(48.075,97.925) 48.093,97.907 48.093,97.531 48.244,97.38 U5.6
  Bottom Layer w0.254: U1.34 43.009,99.509 43.009,100.505 43.627,101.123 44.491,101.123 44.493,101.121 44.879,101.121 v1(48.075,97.925)
NetU1_35: U1.35 U5.2 | length 2.6
  Top Layer w0.254: U5.2 42.483,98.65 42.832,98.301 42.832,98.068 v1(42.85,98.05)
  Bottom Layer w0.254: U1.35 42.509,99.491 42.509,98.495 42.832,98.172 42.832,98.068 v1(42.85,98.05)
NetU1_36: U1.36 U5.5 | length 8.4
  Top Layer w0.254: v1(47.4,96.475) 47.418,96.457 47.467,96.457 47.814,96.11 U5.5
  Bottom Layer w0.254: U1.36 42.009,99.491 42.009,98.146 42.652,97.503 46.381,97.503 47.4,96.484 v1(47.4,96.475)
NetU1_50: U1.50
NetU1_53: U1.53
NetU1_54: U1.54
VBATT: P2.2 Q1.3 | length 2.8
  Top Layer w0.254: P2.2 38.751,116.045 39.232,116.526 39.232,116.682 v1(39.25,116.7)
  Bottom Layer w0.254: Q1.3 38.8,116.25 v1(39.25,116.7)
VIN: C11.2 D3.2 Q1.2 R1.2 U6.2 U6.3 | length 63.5
  Top Layer w0.254: v1(33.7,118.625) 33.718,118.607 34.168,118.607 v1(34.75,118.025)
  Bottom Layer w0.254: v1(33.7,118.625) 31.923,118.625 30.922,117.624 30.674,117.624 28.919,115.869 28.919,115.621 27.918,114.62 27.918,100.732 29.331,99.319 32.024,99.319 32.49,99.784 33.054,99.784 33.798,99.041 33.798,95.802 35.3,94.3 R1.2 ; v1(34.75,118.025) 34.409,117.684 34.409,117.091 D3.2 35.8,117 36.4,116.4 Q1.2 38.15,116.4 40.675,118.925 48.786,118.925 48.935,118.776 48.935,111.865 C11.2 ; U6.2 U6.3 C11.2@49.939,110.689
pads on no net: P4. P4.4 P4.8 P4.9 SW1. U1.2 U1.3 U1.9 U1.11 U1.26 U1.43 U1.51 U1.52 U1.55 U1.56 U1.57 U1.61 U1.62 U2.2 U2.3 U2.4 U2.9 U2.10 U2.11 U3.4 U4.4

## Polygon pours and split planes (outlines as drawn)
GND on Layer 2 (split plane): 28.827,119.224 28.828,119.224 28.829,119.224 28.83,119.224 53.721,119.224 53.824,119.224 53.839,119.223 53.848,119.222 53.848,119.22 53.907,119.218 54.091,119.193 54.273,119.153 54.45,119.097 54.622,119.026 54.787,118.94 54.944,118.84 55.091,118.727 55.228,118.601 55.354,118.464 55.467,118.317 55.567,118.16 55.653,117.995 55.724,117.823 55.78,117.646 55.82,117.464 55.845,117.28 55.847,117.221 55.849,117.221 55.85,117.212 55.851,117.197 55.851,92.202 55.852,92.188 55.845,92.016 55.82,91.832 55.78,91.65 55.724,91.473 55.653,91.301 55.567,91.136 55.467,90.979 55.354,90.832 55.228,90.695 55.091,90.569 54.944,90.456 54.787,90.356 54.622,90.27 54.45,90.199 54.273,90.143 54.091,90.103 53.907,90.078 53.735,90.071 53.721,90.072 28.829,90.072 28.815,90.071 28.643,90.078 28.459,90.103 28.277,90.143 28.1,90.199 27.928,90.27 27.763,90.356 27.606,90.456 27.459,90.569 27.322,90.695 27.196,90.832 27.083,90.979 26.983,91.136 26.897,91.301 26.826,91.473 26.77,91.65 26.73,91.832 26.705,92.016 26.703,92.075 26.701,92.075 26.7,92.084 26.699,92.099 26.699,117.094 26.698,117.108 26.705,117.28 26.73,117.464 26.77,117.646 26.826,117.823 26.897,117.995 26.983,118.16 27.083,118.317 27.196,118.464 27.322,118.601 27.459,118.727 27.606,118.84 27.763,118.94 27.928,119.026 28.1,119.097 28.277,119.153 28.459,119.193 28.643,119.218 28.814,119.225
3V3 on Layer 1 (split plane): 28.827,119.224 28.828,119.224 28.829,119.224 28.83,119.224 53.721,119.224 53.824,119.224 53.839,119.223 53.848,119.222 53.848,119.22 53.907,119.218 54.091,119.193 54.273,119.153 54.45,119.097 54.622,119.026 54.787,118.94 54.944,118.84 55.091,118.727 55.228,118.601 55.354,118.464 55.467,118.317 55.567,118.16 55.653,117.995 55.724,117.823 55.78,117.646 55.82,117.464 55.845,117.28 55.847,117.221 55.849,117.221 55.85,117.212 55.851,117.197 55.851,92.202 55.852,92.188 55.845,92.016 55.82,91.832 55.78,91.65 55.724,91.473 55.653,91.301 55.567,91.136 55.467,90.979 55.354,90.832 55.228,90.695 55.091,90.569 54.944,90.456 54.787,90.356 54.622,90.27 54.45,90.199 54.273,90.143 54.091,90.103 53.907,90.078 53.735,90.071 53.721,90.072 28.829,90.072 28.815,90.071 28.643,90.078 28.459,90.103 28.277,90.143 28.1,90.199 27.928,90.27 27.763,90.356 27.606,90.456 27.459,90.569 27.322,90.695 27.196,90.832 27.083,90.979 26.983,91.136 26.897,91.301 26.826,91.473 26.77,91.65 26.73,91.832 26.705,92.016 26.703,92.075 26.701,92.075 26.7,92.084 26.699,92.099 26.699,117.094 26.698,117.108 26.705,117.28 26.73,117.464 26.77,117.646 26.826,117.823 26.897,117.995 26.983,118.16 27.083,118.317 27.196,118.464 27.322,118.601 27.459,118.727 27.606,118.84 27.763,118.94 27.928,119.026 28.1,119.097 28.277,119.153 28.459,119.193 28.643,119.218 28.814,119.225

## Silkscreen, mask and mechanical layers (free items; w line width, h text height)
Board_outline:
  lines w0.2: 26.289,91.825 26.289,116.844 ; 26.289,92.202 ccw(c28.829,92.202) 28.829,89.662 53.721,89.662 ccw(c53.721,92.202) 56.261,92.202 56.261,117.221 ; 26.289,117.094 cw(c28.829,117.094) 28.829,119.634 53.848,119.634 ; 53.721,119.634 cw(c53.721,117.094) 56.261,117.094